# Altium PCB 直流电机驱动器.PcbDoc
Units mm, origin at the board's own origin, x right, y up, seen from the top; angles counter-clockwise.
Board outline 152.4 x 101.6 mm, 2 copper layers (Top Layer, Bottom Layer); 22 components, 21 nets, 68 pads, 1 vias.
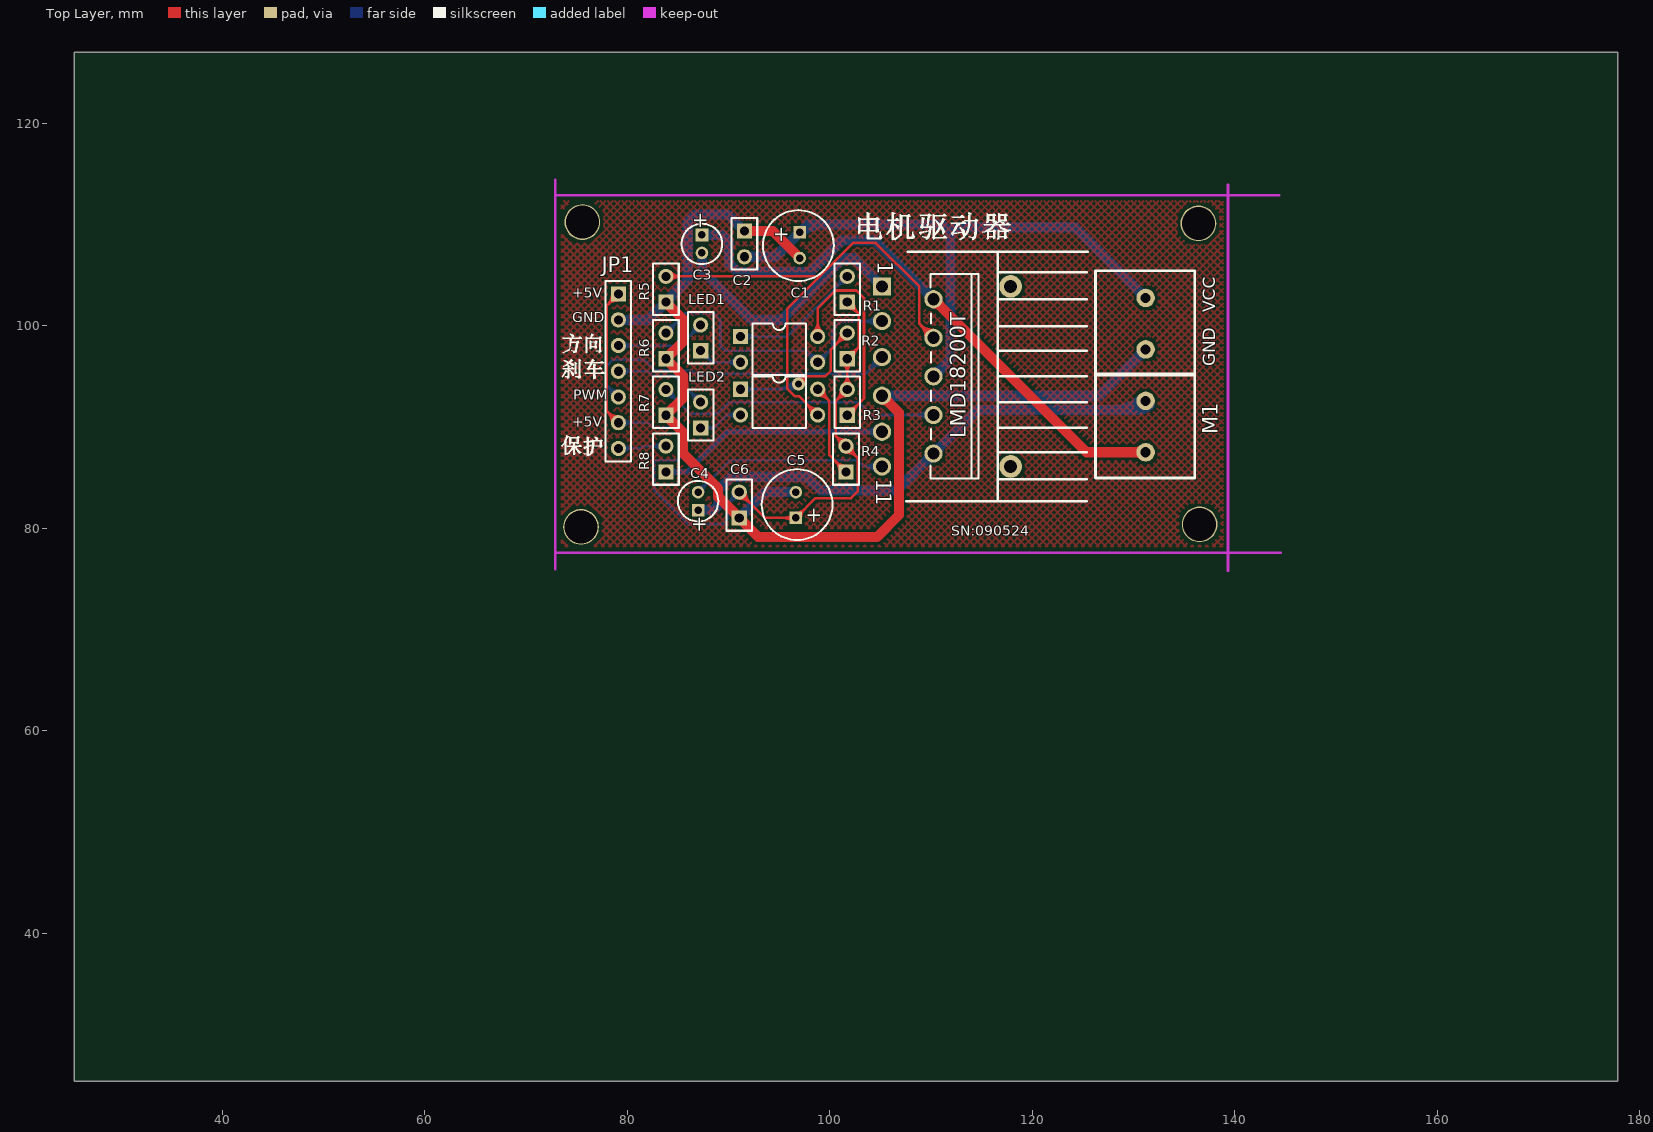
[diagram p0: Top Layer view]
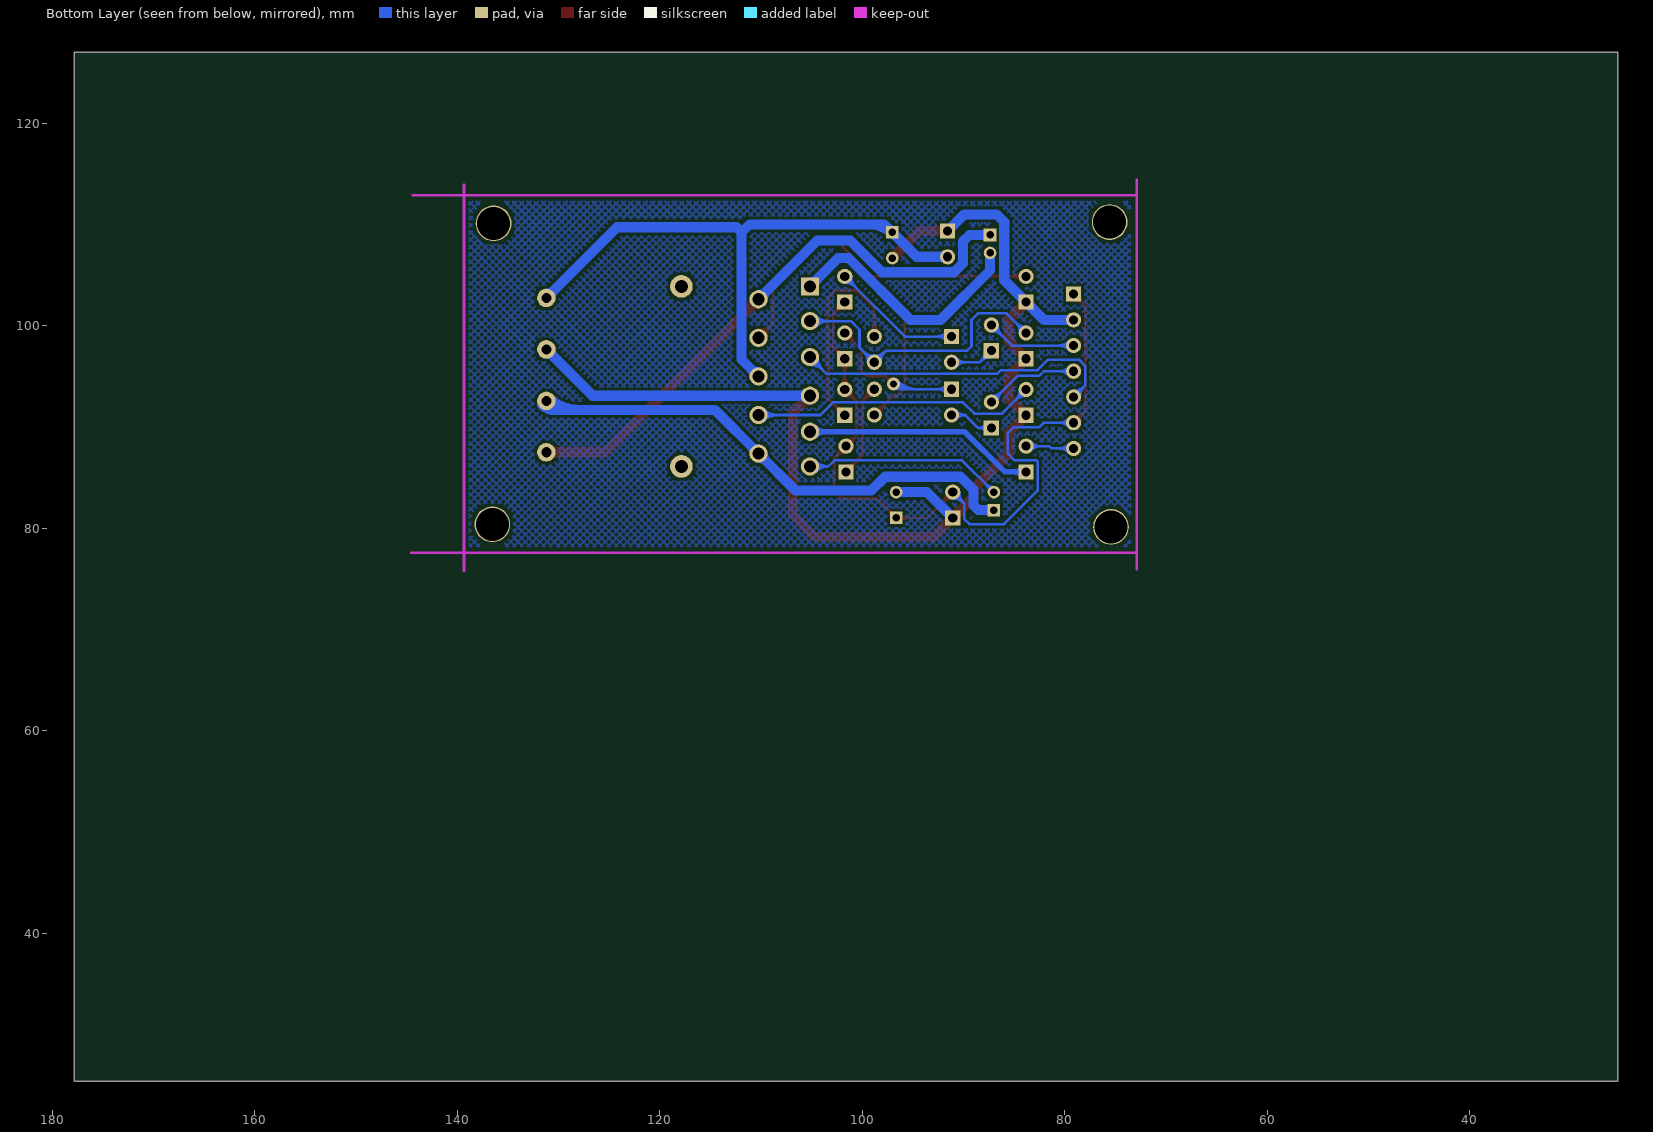
[diagram p1: Bottom Layer view, seen from below]

## Layer stack, top to bottom
Top Layer: signal copper 0.0356
Dielectric: dielectric 0.32, FR-4, Dk 4.8
Bottom Layer: signal copper 0.0356

## Board outline
25.4,25.4 177.8,25.4 177.8,127 25.4,127

## Design rules (kind name [scope] priority, off if disabled: settings)
Clearance [All] p1: gap=0.254
ComponentClearance [All] p1: gap=0.254 collisioncheckmode=3 verticalgap=0.254
PolygonConnect [All] p1: connectstyle=Relief reliefconductorwidth=0.254 reliefentries=4 polygonreliefangle="90 Angle"
RoutingVias [All] p1: holewidth=0.711 width=1.27 viastyle="Through Hole" minholewidth=0.711 minwidth=1.27 maxholewidth=0.711 maxwidth=1.27
SolderMaskExpansion [All] p1: expansion=0.102
TestPointUsage [All] p1: valid=0 allowmultiple=FALSE
Testpoint [All] p1: side=15 testpointundercomponent=TRUE minsize=1.016 maxsize=2.54 preferedsize=1.524 minholesize=0 maxholesize=1.016 preferedholesize=0.813 testpointgrid=0.025 style=1023 order=0-112345678
Width Width_5 [InNet('NetLMD18200T_9')] p1: maxlimit=0.554 minlimit=0.554 preferedwidth=0.554
Width Width_4 [InNet('NetC4_1')] p2: maxlimit=1 minlimit=1 preferedwidth=1
Width Width_3 [InNet('NetC3_2')] p3: maxlimit=1 minlimit=1 preferedwidth=1
Width Width_2 [InNet('NetC3_1')] p4: maxlimit=1 minlimit=1 preferedwidth=1
Width Width_1 [InNet('GND')] p5: maxlimit=1 minlimit=1 preferedwidth=1
Width [InNet('VS')] p6: maxlimit=1 minlimit=1 preferedwidth=1
17 further rules are at their usual default settings.

## Classes and differential pairs
component class 直流电机驱动器: C1 C2 C3 C4 C5 C6 JP1 LED1 LED2 LMD18200T M1 R1 R2 R4

## Components (designator, comment, footprint, x,y, rotation, side; value= is the part's Value field where it differs from the comment)
C1 "" DJDR_8mm 97.028,107.95 r270 top
C2 "104" CPDR 91.567,108.077 r270 top
C3 "" DJDR_4mm 87.376,108.966 r270 top
C4 "" DJDR_4mm 86.995,81.788 r90 top
C5 "" DJDR_8mm 96.647,82.296 r90 top
C6 "104" CPDR 91.059,82.296 r90 top
JP1 "Header 7" HDR1X7 79.121,103.124 r270 top
LED1 "" HDR1X2 87.249,97.536 r90 top
LED2 "" HDR1X2 87.249,89.916 r90 top
LMD18200T "LMD18200" LMD18200T 110.236,94.996 r270 top
M1 "" JK128 130.048,88.011 r180 top
R1 "" HDR-2 102.87,106.172 r90 top
R2 "" HDR-2 102.87,100.584 r90 top
R3 "" HDR-2 102.87,94.996 r90 top
R4 "" HDR-2 102.743,89.408 r90 top
R5 "" HDR-2 84.963,106.172 r90 top
R6 "" HDR-2 84.963,100.584 r90 top
R7 "" HDR-2 84.963,94.996 r90 top
R8 "" HDR-2 84.963,89.408 r90 top
TLP521-1 "" DIP-4 94.996,97.663 r270 top
TLP521-2 "" DIP-4 94.996,92.456 r270 top
VCC "" JK128 130.048,98.171 r180 top (schematic designator "Power 12V")

## Footprints (in the part's own frame and the unit in brackets; to place one, negate y for a bottom-side part, rotate by r counter-clockwise, add the part's x,y. Pads: shape width x height; smd on the part's side, far side on the other; paste and mask are expansions set on the pad)
CPDR [mm] "瓷片电容"
  rect 1.5x1.5 hole 0.9: 1(-1.27,0)
  round 1.5 hole 0.9: 2(1.27,0)
  silkscreen extent -2.54,-1.27 2.54,1.27
DIP-4 [mm] "DIP; 4 Leads; Row Spacing 7.62 mm; Pitch 2.54 mm"
  rect 1.5x1.5 hole 0.9: 1(-1.27,-3.81)
  round 1.5 hole 0.9: 2(1.27,-3.81) 3(1.27,3.81) 4(-1.27,3.81)
  silkscreen extent -2.55,-2.65 2.55,2.65
DJDR_4mm [mm] "电解电容"
  rect 1.25x1.25 hole 0.75: 1(0,0)
  round 1.25 hole 0.75: 2(1.778,0)
  silkscreen extent -1.11,-2 2.89,2
DJDR_8mm [mm] "电解电容"
  rect 1.25x1.25 hole 0.75: 1(-1.27,0)
  round 1.25 hole 0.75: 2(1.27,0)
  silkscreen extent -3.46,-3.63 3.54,3.37
HDR1X2 [mm] "Connector; Header; 2 Position"
  rect 1.5x1.5 hole 0.9: 1(0,0)
  round 1.5 hole 0.9: 2(2.54,0)
  silkscreen extent -1.27,-1.27 3.81,1.27
HDR1X7 [mm] "Connector; Header; 7 Position"
  rect 1.5x1.5 hole 0.9: 1(0,0)
  round 1.5 hole 0.9: 2(2.54,0) 3(5.08,0) 4(7.62,0) 5(10.16,0) 6(12.7,0) 7(15.24,0)
  silkscreen extent -1.27,-1.27 16.51,1.27
HDR-2 [mm]
  rect 1.5x1.5 hole 0.9: 1(-3.84,1.148)
  round 1.5 hole 0.9: 2(-1.3,1.148)
  silkscreen extent -5.11,-0.12 -0.03,2.42
JK128 [mil]
  round 71.81 hole 39.37: 1(-45,20) 2(-45,-180)
  silkscreen extent -235,-285 150,120
LMD18200T [mm] "直流电机驱动"
  round 2.24 hole 1.262: 0(-8.89,7.62) 0(8.89,7.62)
  rect 1.8x1.8 hole 1.2: 1(-8.89,-5.08)
  round 1.8 hole 1.2: 2(-7.62,0) 3(-5.461,-5.08) 4(-3.81,0) 5(-1.905,-5.08) 6(0,0) 7(1.905,-5.08) 8(3.81,0) 9(5.461,-5.08) 10(7.62,0) 11(8.89,-5.08)
  silkscreen extent -12.32,-2.67 12.32,15.24

## Part data
C1 C3 C4 C5: library part "Cap Pol3", "Polarized Capacitor (Surface Mount)"
C2 C6: library part Cap, "Capacitor"
JP1: "Header, 7-Pin"
LED1 LED2: library part LED3, "Typical BLUE SiC LED"
M1 VCC: library part MHDR1X2, "Header, 2-Pin"
R1 R2 R3 R4 R5 R6 R7 R8: library part Res2, "Resistor"
TLP521-1 TLP521-2: library part TLP521-1

## Free pads (board coordinates)
  round 3.524 hole 3.262: 1(75.565,110.236) 2(75.438,80.137) 3(136.525,80.391) 4(136.398,110.109)

## Via types
v1: diameter 1.27, hole 0.711, Top Layer to Bottom Layer, 1 vias

## Nets (pads, with @x,y where several pads share a name; then routed paths per layer and width w, separated by ;. In a path a pad name is that pad's centre, name@x,y a point inside that pad or via, vN(x,y) a via of type N, cw(c..) or ccw(c..) an arc to the next point about the centre after c; other vN are vias at no path point)
+5V: C5.1 C6.2 JP1.1 JP1.6 R1.1 R2.1 R3.2 R4.2 | length 124.2
  Top Layer w0.254: JP1.6@78.498,90.424 ccw(c76.994,90.424) 78.057,91.488 ccw(c79.121,92.551) JP1.6@79.121,91.047 ; JP1.1@78.498,103.124 cw(c76.994,103.124) 78.057,102.06 cw(c79.121,100.997) JP1.1@79.121,102.501 ; JP1.6@78.752,90.424 ccw(c77.861,90.424) 78.491,91.054 ccw(c79.121,91.684) JP1.6@79.121,90.793 ; JP1.1@78.752,103.124 cw(c77.861,103.124) 78.491,102.494 cw(c79.121,101.864) JP1.1@79.121,102.755 ; JP1.6 77.978,91.567 77.978,101.981 JP1.1 ; C6.2@91.059,82.943 cw(c91.059,81.439) 92.123,82.502 cw(c93.186,83.566) C6.2@91.682,83.566 ; C6.2@91.059,83.197 cw(c91.059,82.306) 91.689,82.936 cw(c92.319,83.566) C6.2@91.428,83.566 ; C6.2 93.599,81.026 C5.1 98.603,82.982 102.108,82.982 102.743,83.617 102.743,86.96 R4.2 100.584,89.119 ; C5.1@96.295,80.674 ccw(c95.445,79.824) 95.445,81.026 ccw(c95.445,82.228) C5.1@96.295,81.378 ; C5.1@96.647,81.524 ccw(c96.647,82.726) 97.497,81.876 ccw(c98.347,81.026) C5.1@97.145,81.026 ; R4.2@100.972,88.131 ccw(c99.644,88.179) 100.584,89.119 ; R3.2@101.099,93.696 cw(c99.595,93.696) 100.658,92.632 cw(c101.722,91.569) R3.2@101.722,93.073 ; R4.2@101.226,88.121 ccw(c100.44,88.15) 100.996,88.707 ccw(c101.553,89.263) R4.2@101.582,88.477 ; R3.2@101.281,94.137 ccw(c100.218,95.2) 101.722,95.2 ccw(c103.226,95.2) R3.2@102.163,94.137 ; R2.1@101.281,96.303 cw(c100.218,95.24) 101.722,95.24 cw(c103.226,95.24) R2.1@102.163,96.303 ; R3.2@101.353,93.696 cw(c100.462,93.696) 101.092,93.066 cw(c101.722,92.436) R3.2@101.722,93.327 ; R3.2@101.461,93.957 ccw(c100.831,94.587) 101.722,94.587 ccw(c102.613,94.587) R3.2@101.983,93.957 ; R2.1@101.461,96.483 cw(c100.831,95.853) 101.722,95.853 cw(c102.613,95.853) R2.1@101.983,96.483 ; R4.2@101.572,88.731 cw(c101.524,90.059) 100.584,89.119 ; R4.2@101.595,87.485 cw(c101.595,85.981) 102.659,87.044 cw(c103.722,88.108) R4.2@102.218,88.108 ; R4.2@101.595,87.739 cw(c101.595,86.848) 102.225,87.478 cw(c102.855,88.108) R4.2@101.964,88.108 ; R2.1@101.722,97.113 ccw(c101.722,98.004) 102.352,97.374 ccw(c102.982,96.744) R2.1@102.091,96.744 ; R2.1@101.722,97.367 ccw(c101.722,98.871) 102.786,97.808 ccw(c103.849,96.744) R2.1@102.345,96.744 ; R1.1@101.722,101.709 cw(c101.722,100.205) 102.786,101.268 cw(c103.849,102.332) R1.1@102.345,102.332 ; R1.1@101.722,101.963 cw(c101.722,101.072) 102.352,101.702 cw(c102.982,102.332) R1.1@102.091,102.332 ; R1.1 102.87,101.184 102.87,97.892 R2.1 R3.2 100.584,92.558 100.584,89.119
  Bottom Layer w0.254: JP1.6 82.067,90.424 82.525,89.967 85.065,89.967 85.623,89.408 85.623,87.376 84.963,86.716 82.804,86.716 82.677,86.589 82.677,83.718 85.992,80.403 89.408,80.403 89.928,80.923 89.928,82.435 C6.2 ; JP1.6@79.382,90.163 cw(c80.012,89.533) 80.012,90.424 cw(c80.012,91.315) JP1.6@79.382,90.685 ; JP1.6@79.562,89.983 cw(c80.625,88.92) 80.625,90.424 cw(c80.625,91.928) JP1.6@79.562,90.865 ; C6.2@90.436,83.566 cw(c88.932,83.566) 89.995,82.502 cw(c91.059,81.439) C6.2@91.059,82.943 ; C6.2@90.69,83.566 cw(c89.799,83.566) 90.429,82.936 cw(c91.059,82.306) C6.2@91.059,83.197
BRAKE: JP1.4 LED2.2 | length 16.9
  Bottom Layer w0.254: JP1.4 82.067,95.504 82.527,95.044 84.661,95.044 LED2.2 ; JP1.4@79.382,95.243 cw(c80.012,94.613) 80.012,95.504 cw(c80.012,96.395) JP1.4@79.382,95.765 ; JP1.4@79.562,95.063 cw(c80.625,94) 80.625,95.504 cw(c80.625,97.008) JP1.4@79.562,95.945 ; LED2.2@86.626,92.456 ccw(c85.122,92.456) 86.185,93.52 ccw(c87.249,94.583) LED2.2@87.249,93.079 ; LED2.2@86.88,92.456 ccw(c85.989,92.456) 86.619,93.086 ccw(c87.249,93.716) LED2.2@87.249,92.825
DIR: JP1.3 LED1.2 | length 16.5
  Bottom Layer w0.254: JP1.3 85.217,98.044 LED1.2 ; JP1.3@79.382,97.783 cw(c80.012,97.153) 80.012,98.044 cw(c80.012,98.935) JP1.3@79.382,98.305 ; JP1.3@79.562,97.603 cw(c80.625,96.54) 80.625,98.044 cw(c80.625,99.548) JP1.3@79.562,98.485 ; LED1.2@86.626,100.076 cw(c85.122,100.076) 86.185,99.012 cw(c87.249,97.949) LED1.2@87.249,99.453 ; LED1.2@86.88,100.076 cw(c85.989,100.076) 86.619,99.446 cw(c87.249,98.816) LED1.2@87.249,99.707
GND: C1.2 C2.1 C5.2 C6.1 JP1.2 LMD18200T.7 R5.1 R6.1 R7.1 VCC.1 | length 123.6
  Top Layer w1: R5.1 85.547,100.6 85.547,98.476 R6.1 85.547,95.012 85.547,92.888 R7.1 85.522,89.449 85.522,87.376 88.976,83.922 88.976,83.109 C6.1 92.939,79.146 104.673,79.146 106.832,81.305 106.832,91.415 LMD18200T.7 ; C2.1 94.361,109.347 C1.2 ; LMD18200T.7@105.156,92.691 cw(c105.156,91.725) 105.839,92.408 cw(c106.522,93.091) LMD18200T.7@105.556,93.091
  Bottom Layer w1: JP1.2 82.067,100.584 R5.1 85.979,104.496 85.979,110.236 86.741,110.998 89.916,110.998 C2.1 ; C6.1 93.599,83.566 C5.2 ; LMD18200T.7 126.619,93.091 VCC.1 ; LMD18200T.7@105.439,92.808 cw(c106.122,92.125) 106.122,93.091 cw(c106.122,94.057) LMD18200T.7@105.439,93.374 ; VCC.1@130.779,97.663 cw(c129.784,97.663) 130.488,96.96 cw(c131.191,96.256) VCC.1@131.191,97.251
NetC3_1: C3.1 LMD18200T.2 M1.1 | length 61.2
  Top Layer w1: LMD18200T.2@110.236,102.216 cw(c110.236,101.25) 110.919,101.933 cw(c111.602,102.616) LMD18200T.2@110.636,102.616 ; LMD18200T.2 125.349,87.503 M1.1 ; M1.1@130.9,87.212 ccw(c130.196,86.508) 130.196,87.503 ccw(c130.196,88.498) M1.1@130.9,87.794
  Bottom Layer w1: C3.1 89.408,108.966 90.043,108.331 90.043,106.172 90.932,105.283 98.044,105.283 101.168,108.407 104.445,108.407 LMD18200T.2 ; LMD18200T.2@109.836,102.616 ccw(c108.87,102.616) 109.553,103.299 ccw(c110.236,103.982) LMD18200T.2@110.236,103.016
NetC3_2: C3.2 LMD18200T.1 | length 26.7
  Bottom Layer w1: C3.2 87.376,105.461 92.253,100.584 95.25,100.584 101.346,106.68 102.362,106.68 LMD18200T.1 ; LMD18200T.1@104.756,103.886 ccw(c103.79,103.886) 104.473,104.569 ccw(c105.156,105.252) LMD18200T.1@105.156,104.286
NetC4_1: C4.1 LMD18200T.10 M1.2 | length 59.7
  Bottom Layer w1: C4.1 88.519,81.788 89.027,82.296 89.027,83.82 90.297,85.09 97.739,85.09 99.085,83.744 106.604,83.744 LMD18200T.10 114.554,91.694 130.302,91.694 M1.2 ; LMD18200T.10@109.836,87.376 cw(c108.87,87.376) 109.553,86.693 cw(c110.236,86.01) LMD18200T.10@110.236,86.976 ; LMD18200T.10@110.236,87.776 ccw(c110.236,88.742) 110.919,88.059 ccw(c111.602,87.376) LMD18200T.10@110.636,87.376 ; 128.05,91.694 ccw(c128.05,95.724) M1.2@130.9,92.874 ; 130.464,91.694 ccw(c130.464,93.31) M1.2@131.607,92.167 ; M1.2@130.779,92.583 cw(c129.784,92.583) 130.488,91.88 cw(c131.191,91.176) M1.2@131.191,92.171
NetC4_2: C4.2 LMD18200T.11 | length 26.3
  Bottom Layer w0.254: C4.2 90.145,86.716 102.743,86.716 103.353,86.106 ; C4.2@86.995,84.064 ccw(c86.995,85.266) 87.845,84.416 ccw(c88.695,83.566) C4.2@87.493,83.566 ; LMD18200T.11@104.596,85.573 ccw(c103.353,84.389) 103.353,86.106 ; LMD18200T.11@104.596,86.639 cw(c103.353,87.823) 103.353,86.106 ; LMD18200T.11@104.78,85.748 ccw(c103.945,84.953) 103.945,86.106 ccw(c103.945,87.259) LMD18200T.11@104.78,86.464 ; LMD18200T.11 103.353,86.106
NetJP1_7: JP1.7 R8.2 | length 12.3
  Bottom Layer w0.254: JP1.7 81.331,87.884 81.555,88.108 R8.2 ; JP1.7@79.382,87.623 cw(c80.012,86.993) 80.012,87.884 cw(c80.012,88.775) JP1.7@79.382,88.145 ; JP1.7@79.562,87.443 cw(c80.625,86.38) 80.625,87.884 cw(c80.625,89.388) JP1.7@79.562,88.325 ; R8.2@83.374,87.667 ccw(c82.311,86.604) 82.311,88.108 ccw(c82.311,89.612) R8.2@83.374,88.549 ; R8.2@83.554,87.847 ccw(c82.924,87.217) 82.924,88.108 ccw(c82.924,88.999) R8.2@83.554,88.369
NetLED1_1: LED1.1 TLP521-1.2 | length 11.9
  Bottom Layer w0.254: LED1.1@87.249,96.913 cw(c87.249,95.409) 88.313,96.472 cw(c89.376,97.536) LED1.1@87.872,97.536 ; LED1.1@87.249,97.167 cw(c87.249,96.276) 87.879,96.906 cw(c88.509,97.536) LED1.1@87.618,97.536 ; LED1.1 88.392,96.393 TLP521-1.2 ; TLP521-1.2@90.745,95.952 ccw(c89.682,94.889) 89.682,96.393 ccw(c89.682,97.897) TLP521-1.2@90.745,96.834 ; TLP521-1.2@90.925,96.132 ccw(c90.295,95.502) 90.295,96.393 ccw(c90.295,97.284) TLP521-1.2@90.925,96.654
NetLED2_1: LED2.1 TLP521-2.2 | length 10.7
  Bottom Layer w0.254: LED2.1 88.57,89.916 ; LED2.1@87.534,89.681 cw(c88.031,89.271) 88.031,89.916 cw(c88.031,90.561) LED2.1@87.534,90.151 ; LED2.1@87.73,89.52 cw(c88.57,88.828) 88.57,89.916 ; LED2.1@87.73,90.312 ccw(c88.57,91.004) 88.57,89.916 ; TLP521-2.2@90.711,90.783 ccw(c89.84,90.043) 89.84,91.186 ; TLP521-2.2@90.711,91.589 cw(c89.84,92.329) 89.84,91.186 ; TLP521-2.2@90.905,90.947 ccw(c90.389,90.509) 90.389,91.186 ccw(c90.389,91.863) TLP521-2.2@90.905,91.425 ; TLP521-2.2 89.84,91.186 ; 88.57,89.916 89.84,91.186
NetLMD18200T_3: LMD18200T.3 R6.2 TLP521-1.3 | length 44.6
  Bottom Layer w0.254: R6.2 85.75,101.219 88.57,101.219 89.205,100.584 89.205,97.968 89.637,97.536 97.663,97.536 TLP521-1.3 100.264,97.851 100.264,99.604 101.117,100.457 LMD18200T.3 ; R6.2@83.815,99.653 ccw(c83.815,100.544) 84.445,99.914 ccw(c85.075,99.284) R6.2@84.184,99.284 ; R6.2@83.815,99.907 ccw(c83.815,101.411) 84.879,100.348 ccw(c85.942,99.284) R6.2@84.438,99.284 ; TLP521-1.3@98.183,96.393 ccw(c96.679,96.393) 97.742,97.457 ccw(c98.806,98.52) 98.806,97.016 ccw(c98.806,98.52) 99.87,97.457 ccw(c100.933,96.393) TLP521-1.3@99.429,96.393 ; TLP521-1.3@98.437,96.393 ccw(c97.546,96.393) 98.176,97.023 ccw(c98.806,97.653) 98.806,96.762 ccw(c98.806,97.653) 99.436,97.023 ccw(c100.066,96.393) TLP521-1.3@99.175,96.393 ; LMD18200T.3@104.609,99.91 ccw(c103.29,98.591) 103.29,100.457 ccw(c103.29,102.323) LMD18200T.3@104.609,101.004 ; LMD18200T.3@104.789,100.09 ccw(c103.903,99.204) 103.903,100.457 ccw(c103.903,101.71) LMD18200T.3@104.789,100.824
NetLMD18200T_4: LMD18200T.4 R5.2 TLP521-2.3 | length 62.8
  Top Layer w0.254: R5.2 99.005,104.872 ; R5.2@84.076,104.611 cw(c84.706,103.981) 84.706,104.872 cw(c84.706,105.763) R5.2@84.076,105.133 ; R5.2@84.256,104.431 cw(c85.319,103.368) 85.319,104.872 cw(c85.319,106.376) R5.2@84.256,105.313 ; TLP521-2.3@98.183,91.186 ccw(c96.679,91.186) 97.742,92.25 ccw(c98.806,93.313) TLP521-2.3@98.806,91.809 ; TLP521-2.3@98.437,91.186 ccw(c97.546,91.186) 98.176,91.816 ccw(c98.806,92.446) TLP521-2.3@98.806,91.555 ; TLP521-2.3 96.944,93.048 96.52,93.048 95.783,93.784 95.783,101.651 99.005,104.872 ; LMD18200T.4@109.463,98.806 ccw(c107.597,98.806) 108.916,100.126 ccw(c110.236,101.445) LMD18200T.4@110.236,99.579 ; LMD18200T.4@109.717,98.806 ccw(c108.464,98.806) 109.35,99.692 ccw(c110.236,100.578) LMD18200T.4@110.236,99.325 ; LMD18200T.4 108.839,100.203 108.839,103.861 104.521,108.179 102.311,108.179 99.005,104.872
NetLMD18200T_8: LMD18200T.8 R7.2 | length 37
  Bottom Layer w0.254: R7.2@83.815,93.073 cw(c83.815,91.569) 84.879,92.632 cw(c85.942,93.696) R7.2@84.438,93.696 ; R7.2@83.815,93.327 cw(c83.815,92.436) 84.445,93.066 cw(c85.075,93.696) R7.2@84.184,93.696 ; R7.2 86.198,91.313 88.925,91.313 90.043,92.431 102.895,92.431 104.14,91.186 LMD18200T.8 ; LMD18200T.8@109.689,90.639 ccw(c108.37,89.32) 108.37,91.186 ccw(c108.37,93.052) LMD18200T.8@109.689,91.733 ; LMD18200T.8@109.869,90.819 ccw(c108.983,89.933) 108.983,91.186 ccw(c108.983,92.439) LMD18200T.8@109.869,91.553
NetLMD18200T_9: LMD18200T.9 R8.1 | length 27.1
  Bottom Layer w0.554: R8.1 85.917,85.568 89.884,89.535 LMD18200T.9 ; R8.1@84.149,85.234 cw(c84.957,84.426) 84.957,85.568 cw(c84.957,86.71) R8.1@84.149,85.902 ; LMD18200T.9@104.715,89.094 ccw(c103.652,88.031) 103.652,89.535 ccw(c103.652,91.039) LMD18200T.9@104.715,89.976
NetR1_2: R1.2 TLP521-1.1 | length 20.5
  Bottom Layer w0.254: TLP521-1.1 95.783,98.933 R1.2 ; TLP521-1.1@91.447,98.672 cw(c92.077,98.042) 92.077,98.933 cw(c92.077,99.824) TLP521-1.1@91.447,99.194 ; TLP521-1.1@91.627,98.492 cw(c92.69,97.429) 92.69,98.933 cw(c92.69,100.437) TLP521-1.1@91.627,99.374 ; R1.2@101.099,104.872 cw(c99.595,104.872) 100.658,103.808 cw(c101.722,102.745) R1.2@101.722,104.249 ; R1.2@101.353,104.872 cw(c100.462,104.872) 101.092,104.242 cw(c101.722,103.612) R1.2@101.722,104.503
NetR2_2: R2.2 TLP521-2.1 | length 30.3
  Top Layer w0.254: v1(96.901,94.234) 97.688,95.021 ; v1@96.937,94.741 ccw(c97.005,95.705) 97.688,95.021 ; v1@97.408,94.27 cw(c98.372,94.338) 97.688,95.021 ; R2.2@101.099,99.284 cw(c99.595,99.284) 100.658,98.22 cw(c101.722,97.157) R2.2@101.722,98.661 ; R2.2@101.353,99.284 cw(c100.462,99.284) 101.092,98.654 cw(c101.722,98.024) R2.2@101.722,98.915 ; R2.2 100.101,97.663 100.101,95.554 99.568,95.021 97.688,95.021
  Bottom Layer w0.254: TLP521-2.1 96.393,93.726 ; TLP521-2.1@91.447,93.465 cw(c92.077,92.835) 92.077,93.726 cw(c92.077,94.617) TLP521-2.1@91.447,93.987 ; TLP521-2.1@91.627,93.285 cw(c92.69,92.222) 92.69,93.726 cw(c92.69,95.23) TLP521-2.1@91.627,94.167 ; 94.448,93.726 ccw(c94.448,96.687) v1@96.542,94.593 ; 95.061,93.726 ccw(c95.061,96.074) v1@96.721,94.414 ; 95.675,93.726 ccw(c95.675,95.46) v1(96.901,94.234) 96.393,93.726 ; 96.288,93.726 ccw(c96.288,94.847) v1@97.081,94.054 ; v1@96.443,94.015 cw(c96.213,93.906) 96.393,93.726 ; v1@96.682,93.776 ccw(c96.573,93.546) 96.393,93.726
NetR3_1: R3.1 TLP521-1.4 | length 28.2
  Top Layer w0.254: TLP521-1.4@98.365,99.374 ccw(c97.302,100.437) 98.806,100.437 ccw(c100.31,100.437) TLP521-1.4@99.247,99.374 ; TLP521-1.4@98.545,99.194 ccw(c97.915,99.824) 98.806,99.824 ccw(c99.697,99.824) TLP521-1.4@99.067,99.194 ; TLP521-1.4 98.806,101.702 100.584,103.48 102.616,103.48 103.378,102.718 103.378,92.812 R3.1 ; R3.1@101.722,91.525 ccw(c101.722,92.416) 102.352,91.786 ccw(c102.982,91.156) R3.1@102.091,91.156 ; R3.1@101.722,91.779 ccw(c101.722,93.283) 102.786,92.22 ccw(c103.849,91.156) R3.1@102.345,91.156
NetR4_1: R4.1 TLP521-2.4 | length 16.8
  Top Layer w0.254: TLP521-2.4@98.806,93.103 cw(c98.806,91.599) 99.87,92.662 cw(c100.933,93.726) TLP521-2.4@99.429,93.726 ; TLP521-2.4@98.806,93.357 cw(c98.806,92.466) 99.436,93.096 cw(c100.066,93.726) TLP521-2.4@99.175,93.726 ; TLP521-2.4 99.949,92.583 99.949,87.214 R4.1 ; R4.1@100.972,85.568 ccw(c99.468,85.568) 100.531,86.632 ccw(c101.595,87.695) R4.1@101.595,86.191 ; R4.1@101.226,85.568 ccw(c100.335,85.568) 100.965,86.198 ccw(c101.595,86.828) R4.1@101.595,85.937
PWM: JP1.5 LMD18200T.5 | length 40.9
  Bottom Layer w0.254: JP1.5@78.498,92.964 ccw(c76.994,92.964) 78.057,94.028 ccw(c79.121,95.091) JP1.5@79.121,93.587 ; JP1.5@78.752,92.964 ccw(c77.861,92.964) 78.491,93.594 ccw(c79.121,94.224) JP1.5@79.121,93.333 ; JP1.5 77.978,94.107 77.978,96.012 78.613,96.647 81.643,96.647 82.677,95.613 86.309,95.613 86.672,95.25 103.505,95.25 LMD18200T.5 ; LMD18200T.5@104.383,96.901 cw(c102.517,96.901) 103.836,95.581 cw(c105.156,94.262) LMD18200T.5@105.156,96.128 ; LMD18200T.5@104.637,96.901 cw(c103.384,96.901) 104.27,96.015 cw(c105.156,95.129) LMD18200T.5@105.156,96.382
VS: C1.1 C2.2 LMD18200T.6 VCC.2 | length 64.7
  Bottom Layer w1: C2.2 94.615,106.807 C1.1 97.803,109.995 111.138,109.995 111.912,109.22 ; C1.1@97.116,109.132 cw(c99.2,107.048) 99.2,109.995 ; LMD18200T.6 111.912,96.672 111.912,109.22 ; LMD18200T.6@110.236,95.396 ccw(c110.236,96.362) 110.919,95.679 ccw(c111.602,94.996) LMD18200T.6@110.636,94.996 ; VCC.2@130.779,102.743 ccw(c129.784,102.743) 130.488,103.446 ccw(c131.191,104.15) VCC.2@131.191,103.155 ; VCC.2 124.206,109.728 112.42,109.728 111.912,109.22
pads on no net: LMD18200T.0

## Polygon pours and split planes (outlines as drawn)
no net on Top Layer (hatched 45Degree grid 0.508 track 0.203): 73.382,112.395 138.811,112.395 138.811,78.105 73.382,78.105
no net on Bottom Layer (hatched 45Degree grid 0.508 track 0.203): 73.471,112.264 138.811,112.264 138.811,78.228 73.471,78.228

## Keep-outs
Keep-Out Layer:
  lines w0.254: 72.898,75.946 72.898,114.427 ; 73.025,77.597 144.526,77.597 ; 73.025,112.903 144.399,112.903 ; 139.319,75.819 139.319,113.919

## Silkscreen, mask and mechanical layers (free items; w line width, h text height)
Top Overlay:
  drawing of 1628 lines, arcs and shapes, not listed
  text "+5V" at 74.549,102.743 h1.02
  text "GND" at 74.549,100.33 h1.02
  text "GND" at 138.049,96.012 h1.22 r90
  text "PWM" at 74.676,92.71 h1.02
  text "+5V" at 74.549,90.043 h1.02
  text "SN:090524" at 112.014,79.248 h1.02

## Text inside footprints (layer, text, board x,y; h text height)
C1: Top Overlay "+" at 94.615,109.855 h1.5 r270
C3: Top Overlay "+" at 86.614,111.252 h1.5 r270
C4: Top Overlay "+" at 87.757,79.502 h1.5 r90
C5: Top Overlay "+" at 99.06,80.391 h1.5 r90
LMD18200T: Top Overlay "1" at 104.745,106.375 h1.5 r270; Top Overlay "11" at 104.574,84.913 h1.5 r270